# EAGLE board wiseboard9 (EAGLE 8.2.2)
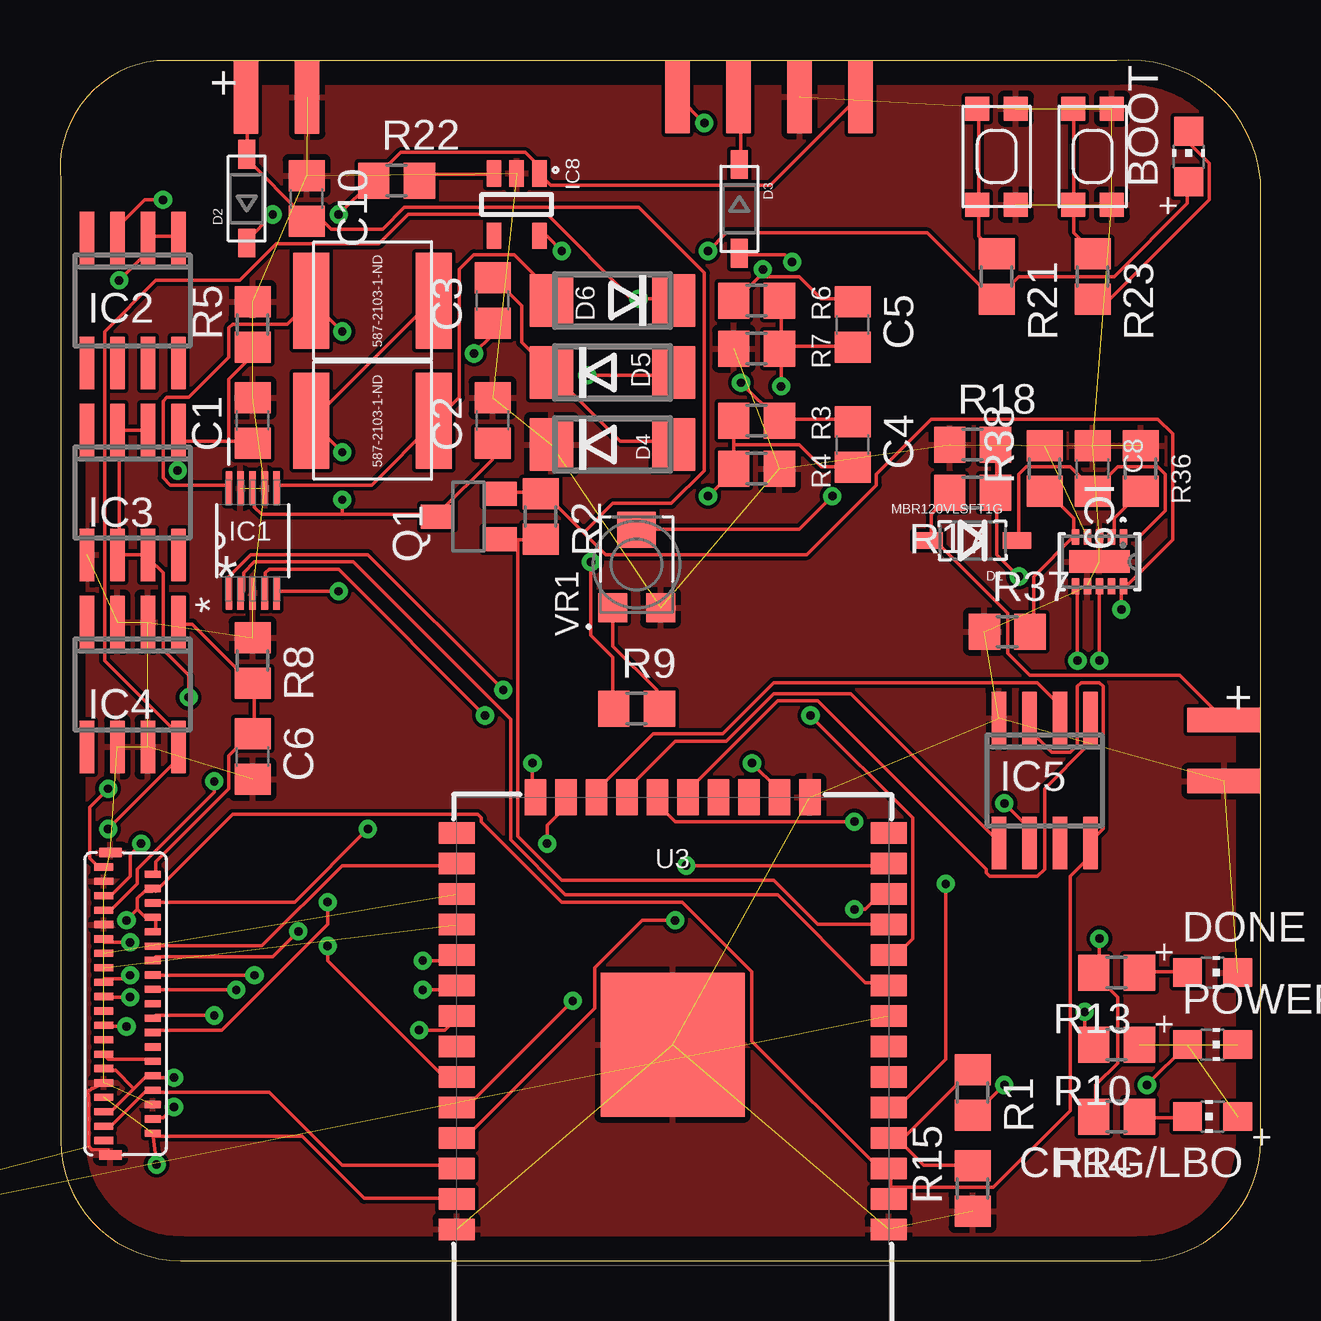
[diagram p0: board, top side]
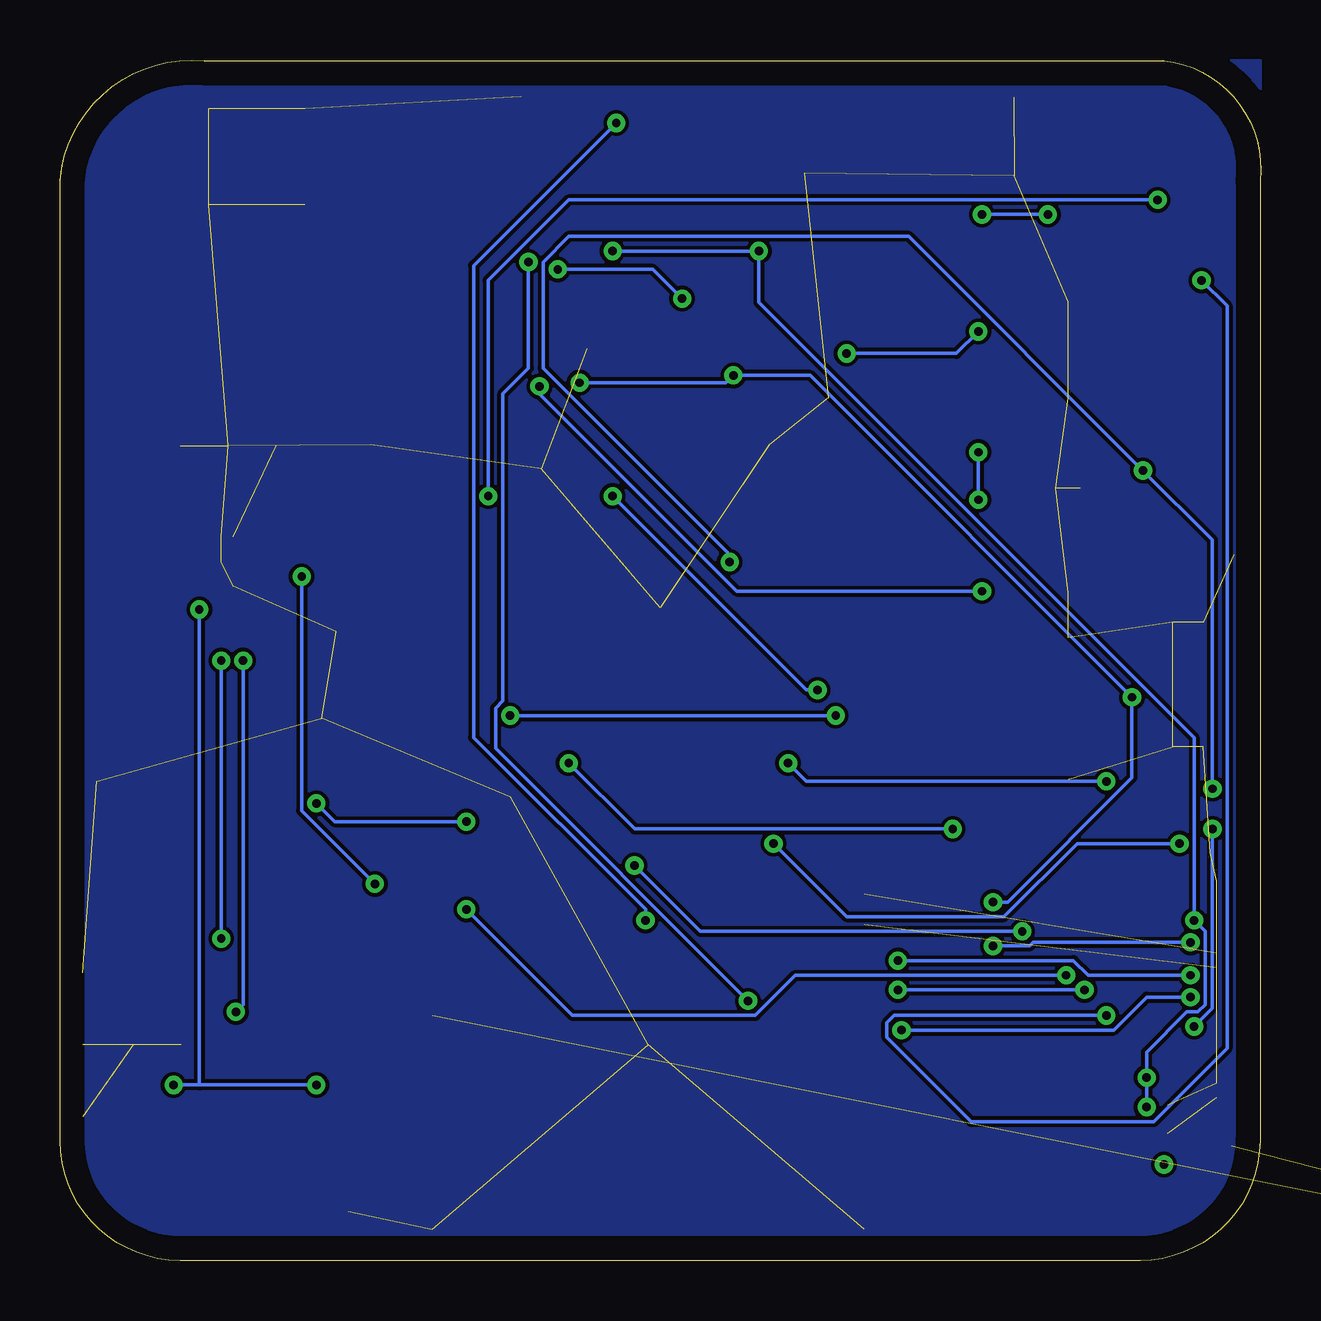
[diagram p1: board, bottom side, seen from below]

Size 50.03 x 50.02 mm. Coordinates in mm from the lower left corner, seen from the top.
Outline: 44.03,50 4.03,50 arc90 0.03,45 0.03,5 arc90 5.03,0 45.03,0 arc90 50.03,5 50.03,45 arc90 44.03,50
Copper layers (1*16): Top 0.035mm / dielectric 1.5mm / Bottom 0.035mm
Design rules "default": minimum track width 6mil, minimum drill 0.35mm, track to track 6mil, track to pad 6mil, pad to pad 6mil, via to via 6mil, smd to smd 6mil, copper to edge 40mil, drill to drill 6mil, minimum pad ring 10mil, minimum via ring 8mil, stop-mask expansion 4mil, vias tented up to drill 0mil, thermal gap 10mil

## Footprints (pad centres in the part's own frame; a part is rotated, then mirrored left to right if it is on the bottom)
587-2103-1-ND = smd 1.5 x 4: P$1 -2.55,0; P$2 2.55,0
CHIP-LED0805 = smd 1.2 x 1.2: A 0,-1.05; C 0,1.05
C0805 = smd 1.3 x 1.5: 1 -0.95,0; 2 0.95,0
SOD-123 = smd 1.2 x 0.7: A 1.85,0; C -1.85,0
DO214AA = smd 1.8 x 2.2: A 2.55,0; C -2.55,0
SOP50P490X110-10N = smd 1.397 x 0.279: 1 -2.184,0.991; 2 -2.184,0.508; 3 -2.184,0; 4 -2.184,-0.508; 5 -2.184,-0.991; 6 2.184,-0.991; 7 2.184,-0.508; 8 2.184,0; 9 2.184,0.508; 10 2.184,0.991
SO08 = smd 0.6 x 2.2: 1 -1.905,-2.6; 2 -0.635,-2.6; 3 0.635,-2.6; 4 1.905,-2.6; 5 1.905,2.6; 6 0.635,2.6; 7 -0.635,2.6; 8 -1.905,2.6
SO8 = smd 0.6 x 2.2: 1 -1.905,-2.6; 2 -0.635,-2.6; 3 0.635,-2.6; 4 1.905,-2.6; 5 1.905,2.6; 6 0.635,2.6; 7 -0.635,2.6; 8 -1.905,2.6
SOT95P280X145-5N = smd 1.1 x 0.6: 1 -1.3,0.95; 2 -1.3,0; 3 -1.3,-0.95; 4 1.3,-0.95; 5 1.3,0.95
DQC10_P84X2P4 = smd 0.66 x 0.305: 1 -1.029,1; 2 -1.029,0.5; 3 -1.029,0; 4 -1.029,-0.5; 5 -1.029,-1; 6 1.029,-1; 7 1.029,-0.5; 8 1.029,0; 9 1.029,0.5; 10 1.029,1 | smd 0.94 x 2.515: 11 0,0
EDGE_CON_2 = smd 1.016 x 3.048: 1 1.27,1.524; 2 -1.27,1.524
EDGE_CON_4 = smd 1.016 x 3.048: 1 2.54,0.254; 2 0,0.254; 3 -5.08,0.254; 4 -2.54,0.254
SOT23 = smd 1 x 1.4: 1 -0.95,-1.306; 2 0.95,-1.306; 3 0,1.306
R0805 = smd 1.3 x 1.5: 1 -0.95,0; 2 0.95,0
KMR2 = smd 1 x 1: 1 2,0.8; 2 2,-0.8; 3 -2,0.8; 4 -2,-0.8
ESP-WROOM-03 = smd 0.9 x 1.5: 1 7.7,9; 2 6.43,9; 3 5.16,9; 4 3.89,9; 5 2.62,9; 6 1.35,9; 7 0.08,9; 8 -1.19,9; 9 -2.46,9; 10 -3.73,9; 11 -5,9; 12 -6.27,9; 13 -7.54,9; 14 -8.81,9; 25 -8.81,-9; 26 -7.54,-9; 27 -6.27,-9; 28 -5,-9; 29 -3.73,-9; 30 -2.46,-9; 31 -1.19,-9; 32 0.08,-9; 33 1.35,-9; 34 2.62,-9; 35 3.89,-9; 36 5.16,-9; 37 6.43,-9; 38 7.7,-9 | smd 1.5 x 0.9: 15 -10.3,5.715; 16 -10.3,4.445; 17 -10.3,3.175; 18 -10.3,1.905; 19 -10.3,0.635; 20 -10.3,-0.635; 21 -10.3,-1.905; 22 -10.3,-3.175; 23 -10.3,-4.445; 24 -10.3,-5.715 | smd 6 x 6: GND 0,0
HFQ339CT-ND = smd 0.4 x 0.95: GND@1 6.6,-0.925; GND@2 -6,-0.925 | smd 0.3 x 0.8: P$1 -5.4,-1.2; P$3 -4.8,-1.2; P$5 -4.2,-1.2; P$7 -3.6,-1.2; P$9 -3,-1.2; P$11 -2.4,-1.2; P$13 -1.8,-1.2; P$15 -1.2,-1.2; P$17 -0.6,-1.2; P$19 0,-1.2; P$21 0.6,-1.2; P$23 1.2,-1.2; P$25 1.8,-1.2; P$27 2.4,-1.2; P$29 3,-1.2; P$31 3.6,-1.2; P$33 4.2,-1.2; P$35 4.8,-1.2; P$37 5.4,-1.2; P$39 6,-1.2 | smd 0.3 x 0.65: P$2 -5.1,0.838; P$4 -4.5,0.838; P$6 -3.9,0.838; P$8 -3.3,0.838; P$10 -2.7,0.838; P$12 -2.1,0.838; P$14 -1.5,0.838; P$16 -0.9,0.838; P$18 -0.3,0.838; P$20 0.3,0.838; P$22 0.9,0.838; P$24 1.5,0.838; P$26 2.1,0.838; P$28 2.7,0.838; P$30 3.3,0.838; P$32 3.9,0.838; P$34 4.5,0.838; P$36 5.1,0.838; P$38 5.7,0.838
TRIM_TC33X-2-103E = smd 1.2 x 1.2: 1 -1.8,1; 3 -1.8,-1 | smd 1.5 x 1.6: 2 1.45,0

## Placement (x,y rotation side)
22  587-2103-1-ND  [587-2103-1-ND]  13.03,40 180 top
BOOT  LED1  [CHIP-LED0805]  47.03,46 0 top
C1  1uF  [C0805]  8.03,35 90 top
C2  1uF  [C0805]  18.03,35 90 top
C3  1uF  [C0805]  18.03,40 90 top
C4  10uF  [C0805]  33.03,34 270 top
C5  10uF  [C0805]  33.03,39 270 top
C6  1uF  [C0805]  8.03,21 270 top
C8  10uF  [C0805]  43.03,33 270 top
C10  10uF  [C0805]  10.28,44.25 270 top
CHRG/LBO  LED3  [CHIP-LED0805]  48.03,6 90 top
D1  MBR120VLSFT1G  [SOD-123]  38.03,30 180 top
D2  MBR120  [SOD-123]  7.78,44.25 90 top
D3  1n4148  [SOD-123]  28.31,43.82 270 top
D4  SS24  [DO214AA]  23.03,34 0 top
D5  SS24  [DO214AA]  23.03,37 0 top
D6  SS24  [DO214AA]  23.03,40 180 top
DONE  LED4  [CHIP-LED0805]  48.03,12 270 top
IC1  LT1945  [SOP50P490X110-10N]  8.03,30 90 top
IC2  LM358  [SO08]  3.03,40 180 top
IC3  L79L15  [SO8]  3.03,32 180 top
IC4  L78L15  [SO8]  3.03,24 180 top
IC5  W25Q  [SO8]  41.03,20 180 top
IC8  IC6  [SOT95P280X145-5N]  19.03,44 270 top
IC9  BQ24210DQCT  [DQC10_P84X2P4]  43.31,29.12 270 top
J1  BAT_CON  [EDGE_CON_2]  9.03,50 180 top
J2  SOL_CON  [EDGE_CON_2]  50.03,21.25 90 top
J3  PROG_HEADER  [EDGE_CON_4]  28.28,48.75 180 top
J4  BUT_CON  [EDGE_CON_2]  -9.97,0 0 top  (outside the outline)
POWERGOOD  LED2  [CHIP-LED0805]  48.03,9 270 top
Q1  IRLM  [SOT23]  17.03,31 90 top
R1  10K  [R0805]  38.03,7 270 top
R2  10k  [R0805]  20.03,31 270 top
R3  470k  [R0805]  29.03,35 0 top
R4  39k  [R0805]  29.03,33 180 top
R5  39k  [R0805]  8.03,39 90 top
R6  560k  [R0805]  29.03,40 180 top
R7  39k  [R0805]  29.03,38 0 top
R8  39k  [R0805]  8.03,25 270 top
R9  200k  [R0805]  24.03,23 0 top
R10  1K  [R0805]  44.03,9 180 top
R13  1K  [R0805]  44.03,12 180 top
R14  1K  [R0805]  44.03,6 180 top
R15  10K  [R0805]  38.03,3 90 top
R17  10K  [R0805]  38.03,32 180 top
R18  10K  [R0805]  38.03,34 0 top
R21  10K  [R0805]  39.03,41 270 top
R22  10K  [R0805]  14.03,45 0 top
R23  1K  [R0805]  43.03,41 270 top
R36  790  [R0805]  45.03,33 270 top
R37  10k  [R0805]  39.47,26.2 0 top
R38  7.6k  [R0805]  41.03,33 90 top
SW1  SPST_TACT-KMR2  [KMR2]  43.03,46 270 top
SW2  SPST_TACT-KMR2  [KMR2]  39.03,46 270 top
U3  ESP-WROOM-03  [ESP-WROOM-03]  25.53,9 270 top
U$4  FH26W-39S  [HFQ339CT-ND]  3.03,11 270 top
U$5  587-2103-1-ND  [587-2103-1-ND]  13.03,35 180 top
VR1  TC33X-104ECT-ND  [TRIM_TC33X-2-103E]  24.03,29 90 top

## Library data of the parts
22 D4-D6 IC3-IC5 IC8 J1-J4 U$4 U$5 = WISE
BOOT CHRG/LBO D2 D3 DONE POWERGOOD SW1 SW2 = adafruit
C1-C6 C8 C10 R1-R10 R13-R15 R17 R18 R21-R23 R36-R38 = resistor
D1 = microbuilder
IC1 = LTC_By_element14_Batch_1; MPN: LT1945EMS#PBF; OC_FARNELL: 1273495; OC_NEWARK: 57M7266; PACKAGE: MSOP-10; SUPPLIER: Linear Technology
IC2 = linear
IC9 = WISE; MANUFACTURER_PART_NUMBER: BQ24210DQCT; VENDOR: Vendor
Q1 = IRLML6402; AVAILABILITY: Unavailable; DESCRIPTION: MOSFETs, Semiconductors and Actives, mosfet, Transistors, Discretes (diodes, transistors, thyristors ...); MF: International Rectifier; MP: IRLML6402; PACKAGE: SOT-23-3 International Rectifier; PRICE: None
U3 = esp32
VR1 = WISE; AVAILABILITY: Good; DESCRIPTION: Res%20Trimmer%2010K%20Ohm%2025%25%200.1W%281/10W%29%201%28Elec%29/1%28Mech%29Turn%20%283%20X%203.8mm%29%20Foot%20Print%20SMD%20Embossed%20T/R; MF: Bourns; MP: TC33X-2-103E; PACKAGE: None; PRICE: 0.16 USD

## Nets
+3V3: BOOT.A IC5.3 IC5.8 IC8.5 R21.2 U3.2 U3.3 U$4.P$4 U$4.P$8 U$4.P$10 U$4.P$29 U$4.P$30 U$4.P$35 U$4.P$36
+15V: C6.1 IC4.1 R8.2 U$4.P$2
+22V: C5.1 D6.C IC4.8 R6.2 U$4.P$23
-15V: C1.1 IC3.1 R5.1 R9.1 U$4.P$1
-20V: C4.1 D5.A IC3.2 IC3.3 IC3.6 IC3.7 R3.2 U$4.P$24
BAT_SENS: R1.1 R15.2 U3.4
BUT_CON: J4.1 U3.8
CKV: U3.37 U$4.P$33 U$4.P$38
CL: U3.23 U$4.P$5
CLK: IC5.6 U3.20
D0: U3.26 U$4.P$12
D1: U3.27 U$4.P$13
D2: U3.13 U$4.P$14
D3: U3.28 U$4.P$15
D4: U3.12 U$4.P$16
D5: U3.29 U$4.P$17
D6: U3.30 U$4.P$18
D7: U3.31 U$4.P$19
ESP_DI: IC5.2 U3.22
ESP_DO: IC5.5 U3.21
FB2: C5.2 IC1.5 R6.1 R7.2
GMODE: U$4.P$27 U$4.P$28
GND: C1.2 C2.2 C6.2 C8.1 C10.1 D4.C DONE.C IC1.3 IC1.7 IC1.9 IC3.5 IC4.2 IC4.3 IC4.6 IC4.7 IC5.4 IC8.2 IC9.3 IC9.7 IC9.11 J1.2 J2.2 J3.4 J4.2 R4.1 R5.2 R7.1 R8.1 R15.1 R18.1 R36.1 R37.1 SW1.1 SW1.3 SW2.1 SW2.3 U3.1 U3.15 U3.38 U3.GND U$4.GND@1 U$4.GND@2 U$4.P$3 U$4.P$9 U$4.P$31 U$4.P$34 VR1.3
GPIO0: R23.1 SW1.2 SW1.4
IC5: IC5.1 U3.19
LE: U3.16 U$4.P$6
N$1: IC2.3 VR1.2
N$2: 22.P$2 C3.1 IC1.10
N$3: C8.2 D1.C IC9.1
N$4: 22.P$1 C2.1 IC1.8 Q1.3 U$5.P$2
N$5: D6.A IC1.6 U$5.P$1
N$6: C3.2 D4.A D5.C
N$7: U3.25
N$8: R9.2 VR1.1
N$9: IC9.6 R10.2
N$10: CHRG/LBO.C R14.1
N$11: POWERGOOD.C R10.1
N$14: DONE.A R13.1
N$15: IC9.8 R13.2 R14.2
N$17: IC9.2 R36.2
N$22: BOOT.C R23.2
N$23: IC8.3 R22.2
N$28: IC9.5 R37.2 R38.1
N$30: IC9.4 R38.2
N$37: U3.14
N$48: U3.6
N$49: U3.7
NEGEN: IC1.2 U3.9
NFB1: C4.2 IC1.1 R3.1 R4.2
OE: U3.24 U$4.P$7
PANEL: D1.A J2.1 R17.2
PANEL_SENS: R17.1 R18.2 U3.5
POSEN: IC1.4 U3.10
RESET: R21.1 SW2.2 SW2.4
RXD: D3.A U3.34
RXD_5V: D3.C J3.2
SPH: U3.33 U$4.P$11
SPV: U3.36 U$4.P$32 U$4.P$37
SUP_CTRL: Q1.1 R2.2 U3.11
TXD: J3.1 U3.35
V+: IC2.8
V-: IC2.4
VBAT: C10.2 CHRG/LBO.A D2.A IC9.10 J1.1 POWERGOOD.A Q1.2 R1.2 R2.1
VCC: D2.C IC8.1 J3.3 R22.1
VCOMMON: IC2.1 IC2.2 U$4.P$22

## Tracks (layer width: path | path; a pad name or v marks a point on that pad's centre or on a via)
+3V3  (via drill 0.35)
  Top 0.152: 34.62,3.05 34.62,3.81 U3.3 34.47,3.96 34.01,3.96 28.83,9.14 28.83,12.04 25.93,14.94 20.91,14.94 17.55,18.29 17.55,18.44 17.4,18.59 7.19,18.59 3.99,15.39 U$4.P$4 3.84,15.39 3.53,15.39 3.23,15.09 3.23,14.63 | 34.62,3.05 34.62,2.59 U3.2 | 34.62,3.05 38.89,3.05 42.09,6.25 42.09,16 42.85,16.76 42.85,17.37 IC5.8 43,17.53 43.46,17.98 43.46,23.93 43.31,24.08 42.55,24.08 42.39,23.93 42.39,21.49 42.09,21.18 41.33,21.18 40.41,22.1 40.41,22.55 IC5.3 | U$4.P$10 3.99,13.72 3.99,14.17 U$4.P$8 3.84,14.33 3.53,14.33 3.23,14.63 | v4.75,6.4 4.29,5.94 3.99,5.94 U$4.P$36 | v4.75,7.62 3.99,7.62 U$4.P$30 3.84,7.62 3.53,7.62 3.07,7.16 | 3.07,7.16 2.16,6.25 1.86,6.25 U$4.P$35 | 3.07,7.16 2.31,7.92 1.86,7.92 U$4.P$29 | v2.77,14.17 3.23,14.63 | v20.91,42.06 20.3,42.67 19.99,42.67 IC8.5 | v27,42.06 27.76,42.82 36.15,42.82 38.89,40.08 R21.2 39.04,40.08 39.96,41 43.92,41 46.97,44.04 46.97,44.81 BOOT.A
  Bottom 0.152: v4.75,6.4 v4.75,7.62 4.75,8.69 3.07,10.36 2.62,10.36 2.31,10.67 2.31,13.72 v2.77,14.17 2.77,21.79 20.91,39.93 v20.91,42.06 v27,42.06
+15V
  Top 0.152: U$4.P$2 3.99,16.15 3.99,16.61 7.04,19.66 7.04,21.03 7.95,21.95 C6.1 8.1,22.1 8.1,23.93 R8.2 7.95,24.08 5.51,26.52 5.06,26.52 IC4.1
+22V  (via drill 0.35)
  Top 0.152: 29.29,41 29.13,41 28.22,40.08 R6.2 | 29.29,41 30.81,41 31.73,40.08 32.94,40.08 C5.1 | v2.77,9.75 1.86,9.75 U$4.P$23 | v2.01,17.98 4.9,20.88 4.9,21.34 IC4.8 4.9,21.49 4.9,21.95 1.86,24.99 1.86,38.71 3.99,40.84 7.49,40.84 9.02,42.37 13.29,42.37 14.5,43.59 20.3,43.59 23.8,40.08 v24.11,40.08 25.48,40.08 D6.C | v29.29,41.3 29.29,41
  Bottom 0.152: v2.77,9.75 2.01,10.52 v2.01,17.98 | v29.29,41.3 25.32,41.3 v24.11,40.08
-15V  (via drill 0.35)
  Top 0.152: v2.01,19.66 1.25,18.9 1.25,16.76 1.55,16.46 1.7,16.46 U$4.P$1 | 4.9,34.14 4.9,34.59 IC3.1 4.9,34.14 | 4.9,34.14 v4.9,32.92 | 4.9,34.14 7.04,34.14 | 7.04,34.14 7.95,34.14 C1.1 | 7.04,34.14 7.04,36.73 7.95,37.64 7.95,37.95 R5.1 | v22.12,29.11 22.12,26.06 23.04,25.15 23.04,23.01 R9.1
  Bottom 0.152: v2.01,19.66 2.01,30.02 v4.9,32.92 14.66,42.67 28.83,42.67 29.9,41.6 29.9,37.19 22.12,29.41 v22.12,29.11
-20V  (via drill 0.35)
  Top 0.152: 2.46,34.59 3.53,34.59 IC3.2 | C4.1 32.94,35.05 30.05,35.05 R3.2 29.9,35.05 v28.37,36.58 | v11.15,14.94 11.15,14.02 6.73,9.6 3.99,9.6 U$4.P$24 | v5.36,23.47 5.36,24.38 4.29,25.45 4.29,28.65 3.68,29.26 IC3.7 3.53,29.41 2.46,29.41 | v21.97,36.88 25.48,36.88 D5.A | 2.46,29.41 2.46,34.59 | 2.46,34.59 IC3.3 | 2.46,29.41 IC3.6
  Bottom 0.152: v11.15,14.94 10.54,14.94 5.36,20.12 v5.36,23.47 18.77,36.88 v21.97,36.88 22.28,36.58 v28.37,36.58
BAT_SENS
  Top 0.152: 34.93,5.03 35.99,3.96 37.97,3.96 R15.2 | 34.93,5.03 34.62,5.03 U3.4 34.93,5.03 | 34.93,5.03 35.08,5.03 37.97,7.92 R1.1
BUT_CON  (1 unrouted)
CKV  (via drill 0.35)  (1 unrouted)
  Top 0.152: U3.37 16.49,2.59 12.68,2.59 10.08,5.18 3.99,5.18 U$4.P$38 v4.03,4
CL  (via drill 0.35)
  Top 0.152: v3.38,17.37 2.92,16.92 2.92,16 2.16,15.24 1.86,15.24 U$4.P$5 | v20.3,17.37 20.3,18.14 21.06,18.9 21.06,19.2 U3.23
  Bottom 0.152: v3.38,17.37 7.65,17.37 10.69,14.33 17.25,14.33 v20.3,17.37
CLK  (via drill 0.35)
  Top 0.152: v33.1,18.29 25.63,18.29 25.02,18.9 25.02,19.2 U3.20 | v39.35,19.05 40.26,18.14 40.26,17.53 IC5.6
  Bottom 0.152: v33.1,18.29 38.58,18.29 v39.35,19.05
D0
  Top 0.152: U$4.P$12 3.99,13.11 8.41,13.11 11.76,16.46 16.49,16.46 U3.26
D1  (1 unrouted)
D2  (via drill 0.35)
  Top 0.152: v9.93,13.72 8.87,12.65 3.99,12.65 U$4.P$14 | v26.09,16.46 34.47,16.46 U3.13
  Bottom 0.152: v9.93,13.72 23.34,13.72 v26.09,16.46
D3  (1 unrouted)
D4  (via drill 0.35)
  Top 0.152: v8.1,11.89 3.99,11.89 U$4.P$16 | v33.1,14.63 33.55,14.63 34.16,15.24 34.47,15.24 U3.12
  Bottom 0.152: v8.1,11.89 19.38,11.89 21.06,10.21 28.68,10.21 v33.1,14.63
D5  (via drill 0.35)
  Top 0.152: v2.92,11.89 2.77,11.73 1.86,11.73 U$4.P$17 | v15.11,12.5 16.33,12.5 16.49,12.65 U3.29
  Bottom 0.152: v2.92,11.89 7.19,11.89 7.8,12.5 v15.11,12.5
D6  (via drill 0.35)
  Top 0.152: v7.34,11.28 3.99,11.28 U$4.P$18 | v15.11,11.28 16.33,11.28 16.49,11.43 U3.30
  Bottom 0.152: v15.11,11.28 v7.34,11.28
D7  (via drill 0.35)
  Top 0.152: v2.92,10.97 1.86,10.97 U$4.P$19 | v14.96,9.6 16.03,9.6 16.49,10.06 U3.31
  Bottom 0.152: v2.92,10.97 4.75,10.97 6.12,9.6 v14.96,9.6
ESP_DI
  Top 0.152: U3.22 22.43,19.36 22.43,19.66 24.72,21.95 27.61,21.95 29.74,24.08 40.72,24.08 41.63,23.16 41.63,22.71 IC5.2
ESP_DO
  Top 0.152: U3.21 23.65,19.36 23.65,19.66 25.63,21.64 27.76,21.64 29.74,23.62 32.94,23.62 39.04,17.53 IC5.5
FB2  (via drill 0.35)
  Top 0.152: v11.61,27.89 9.02,27.89 IC1.5 | v30.05,36.42 30.05,37.95 R7.2 30.05,38.1 | 30.05,38.1 32.94,38.1 C5.2 | 30.05,38.1 30.05,39.93 R6.1
  Bottom 0.152: v11.61,27.89 21.82,27.89 30.05,36.12 v30.05,36.42
GMODE
  Top 0.152: U$4.P$28 3.84,8.38 2.01,8.38 1.86,8.53 U$4.P$27
GND  (45 unrouted)
  Top 0.152: U$4.P$31 1.38,7.18 1.33,7.18 1.28,7.13 1.12,7.05 1.2,6.83 1.2,4.75 1.33,4.62 2.02,4.62 U$4.GND@1
  pour Top: 0.03,50 45.96,50 arc-45 49.49,48.54 50.03,48 50.03,4.41 arc-45 49.03,2 47.03,0 4.1,0 arc-45 0.56,1.46 0.03,2
  pour Bottom: 0.03,50 45.96,50 arc-45 49.49,48.54 50.03,48 50.03,4.41 arc-45 49.03,2 47.03,0 4.1,0 arc-45 0.56,1.46 0.03,2
GPIO0
  Top 0.152: R23.1 43,42.06 42.24,42.82 42.24,43.89 SW1.2 42.24,44.04 42.24,47.85 SW1.4
IC5
  Top 0.152: U3.19 26.24,19.36 26.24,19.66 29.9,23.32 31.57,23.32 38.58,16.31 38.58,16.15 38.74,16 40.72,16 41.02,16.31 41.02,19.66 42.85,21.49 42.85,22.55 IC5.1
LE  (via drill 0.35)
  Top 0.152: v12.83,17.98 9.78,14.94 3.99,14.94 U$4.P$6 | v28.83,20.73 29.9,19.66 29.9,19.36 U3.16
  Bottom 0.152: v12.83,17.98 26.09,17.98 v28.83,20.73
N$1  (via drill 0.35)
  Top 0.152: v32.18,31.85 30.81,30.48 24.11,30.48 VR1.2 | v4.29,44.2 3.53,44.2 2.46,43.13 2.46,42.67 IC2.3
  Bottom 0.152: v32.18,31.85 32.18,40.84 28.83,44.2 v4.29,44.2
N$2  (via drill 0.35)
  Top 0.152: IC1.10 7.04,32.31 4.6,32.31 4.29,32.61 4.29,35.81 4.45,35.97 5.36,35.97 7.04,37.64 7.04,38.86 7.19,39.01 9.48,39.01 10.39,39.93 22.P$2 10.54,39.93 v11.76,38.71 | v17.25,37.8 18.01,38.56 18.01,39.01 C3.1
  Bottom 0.152: v17.25,37.8 12.68,37.8 v11.76,38.71
N$3
  Top 0.152: IC9.1 44.37,30.18 44.98,30.18 46.05,31.24 46.05,32.77 45.75,33.07 44.07,33.07 43.16,32.16 C8.2 43,32.16 42.09,33.07 40.26,33.07 39.96,32.77 39.96,30.02 D1.C
N$4  (via drill 0.35)
  Top 0.152: 11.76,31.09 15.57,31.09 Q1.3 15.72,31.09 18.01,33.38 18.01,33.98 C2.1 | 11.76,31.09 8.41,31.09 8.1,31.39 8.1,32.16 IC1.8 | 22.P$1 15.57,40.08 10.54,35.05 U$5.P$2 10.54,34.9 v11.76,33.68 | v11.76,31.7 11.76,31.09
  Bottom 0.152: v11.76,33.68 v11.76,31.7
N$5
  Top 0.152: IC1.6 9.02,32.31 12.98,32.31 15.57,34.9 U$5.P$1 15.72,35.05 16.64,35.97 16.64,41.3 17.25,41.91 18.92,41.91 20.45,40.39 20.45,40.08 D6.A
N$6
  Top 0.152: C3.2 18.16,40.84 19.23,39.78 19.23,38.25 20.45,37.03 D5.C 20.6,36.88 23.34,34.14 25.48,34.14 D4.A
N$8
  Top 0.152: VR1.1 23.04,27.13 23.04,25.6 24.87,23.77 24.87,23.01 R9.2
N$9  (via drill 0.35)
  Top 0.152: v42.39,24.99 42.39,28.04 IC9.6 | v42.7,10.36 42.7,9.45 43,9.14 R10.2
  Bottom 0.152: v42.39,24.99 42.39,10.67 v42.7,10.36
N$10
  Top 0.152: CHRG/LBO.C 46.97,5.94 44.98,5.94 R14.1
N$11  (1 unrouted)
N$14
  Top 0.152: DONE.A 46.97,12.04 44.98,12.04 R13.1
N$15  (via drill 0.35)
  Top 0.152: v43.31,24.99 43.31,28.04 IC9.8 | v43.31,13.41 43.31,12.19 43.16,12.04 R13.2 43.16,11.89 44.07,10.97 44.07,8.23 43.16,7.32 43.16,6.1 R14.2
  Bottom 0.152: v43.31,13.41 v43.31,24.99
N$17
  Top 0.152: IC9.2 43.92,30.18 43.92,30.94 44.98,32 R36.2
N$22
  Top 0.152: BOOT.C 47.12,46.94 47.12,46.48 47.88,45.72 47.88,44.2 43.77,40.08 43.16,40.08 R23.2
N$23
  Top 0.152: IC8.3 18.01,45.26 15.27,45.26 15.11,45.11 R22.2
N$28
  Top 0.152: 42.24,30.18 42.24,30.94 41.17,32 R38.1 | 42.24,30.18 40.56,28.5 40.56,26.21 R37.2 | 42.24,30.18 IC9.5
N$30  (1 unrouted)
NEGEN
  Top 0.152: IC1.2 7.65,27.89 7.65,28.65 8.1,29.11 12.22,29.11 18.77,22.55 18.77,17.53 21.06,15.24 29.9,15.24 33.55,11.58 34.47,11.58 U3.9
NFB1  (via drill 0.35)
  Top 0.152: v18.47,23.77 12.83,29.41 7.95,29.41 7.04,28.5 7.04,27.89 IC1.1 | v27,31.85 28.07,32.92 R4.2 28.07,33.07 28.07,33.98 | 28.07,33.98 28.07,34.9 R3.1 | 28.07,33.98 30.81,33.98 31.73,33.07 32.94,33.07 C4.2
  Bottom 0.152: v18.47,23.77 18.92,23.77 v27,31.85
OE  (via drill 0.35)
  Top 0.152: v6.43,19.96 6.43,19.51 3.23,16.31 3.23,15.7 2.16,14.63 1.86,14.63 U$4.P$7 | v19.69,20.73 19.69,19.36 U3.24
  Bottom 0.152: v6.43,19.96 18.92,19.96 v19.69,20.73
PANEL
  Top 0.152: R17.2 37.06,31.85 36.3,31.09 36.3,30.02 D1.A 36.3,29.87 36.6,29.87 39.5,26.98 39.5,25.3 40.41,24.38 46.66,24.38 48.49,22.55 J2.1
PANEL_SENS  (via drill 0.35)
  Top 0.152: v36.91,15.7 36.91,8.38 34.93,6.4 34.62,6.4 U3.5 | v39.96,28.5 39.04,29.41 39.04,31.85 R17.1 39.04,32 39.04,33.98 R18.2
  Bottom 0.152: v36.91,15.7 39.96,18.75 v39.96,28.5
POSEN  (via drill 0.35)
  Top 0.152: v17.7,22.71 11.61,28.8 8.71,28.8 8.56,28.65 8.56,27.89 IC1.4 | v31.27,22.71 35.54,18.44 35.54,13.41 34.93,12.8 34.62,12.8 U3.10
  Bottom 0.152: v31.27,22.71 v17.7,22.71
RESET
  Top 0.152: R21.1 38.89,42.06 38.28,42.67 38.28,43.89 SW2.2 38.28,44.04 38.28,47.85 SW2.4
RXD  (via drill 0.35)
  Top 0.152: v30.51,41.6 30.2,41.91 28.37,41.91 D3.A | v21.36,10.82 16.94,6.4 16.64,6.4 U3.34
  Bottom 0.152: v30.51,41.6 30.51,37.19 31.57,36.12 31.57,23.32 31.88,23.01 31.88,21.34 v21.36,10.82
RXD_5V
  Top 0.152: D3.C 28.37,45.72 28.37,48.46 J3.2
SPH  (via drill 0.35)
  Top 0.152: v2.92,13.26 1.86,13.26 U$4.P$11 | v11.15,13.11 11.15,12.5 15.88,7.77 16.49,7.77 U3.33
  Bottom 0.152: v2.92,13.26 9.48,13.26 9.63,13.11 v11.15,13.11
SPV
  Top 0.152: U$4.P$37 1.86,5.64 2.16,5.64 3.53,7.01 3.84,7.01 U$4.P$32 3.99,7.01 8.71,7.01 11.76,3.96 16.49,3.96 U3.36
SUP_CTRL
  Top 0.152: 19.08,30.02 19.99,30.02 R2.2 | 19.08,30.02 18.47,30.02 Q1.1 | 19.08,30.02 19.08,17.68 20.91,15.85 29.74,15.85 31.57,14.02 34.47,14.02 U3.11
TXD  (via drill 0.35)
  Top 0.152: v25.63,14.17 24.26,14.17 22.28,12.19 22.28,10.52 16.94,5.18 16.64,5.18 U3.35 | v26.85,47.4 25.78,48.46 J3.1
  Bottom 0.152: v25.63,14.17 25.63,14.63 32.79,21.79 32.79,41.45 v26.85,47.4
VBAT  (via drill 0.35)  (1 unrouted)
  Top 0.152: v45.29,7.32 POWERGOOD.A | v39.35,7.32 38.13,6.1 R1.2 | J1.1 7.8,48.46 7.8,46.18 D2.A 7.65,46.02 10.24,43.43 C10.2 10.39,43.28 11,43.28 11.3,42.98 13.44,42.98 14.35,43.89 24.11,43.89 26.85,41.15 26.85,32.92 25.48,31.55 23.04,31.55 21.82,30.33 | 21.82,30.33 20.14,32 R2.1 19.99,32 18.47,32 Q1.2 | 21.82,30.33 22.73,29.41 31.12,29.41 34.01,32.31 34.01,32.77 36.3,35.05 45.75,35.05 46.36,34.44 46.36,30.02 44.53,28.19 44.37,28.19 IC9.10 44.22,28.04 v44.22,27.13
  Bottom 0.152: v39.35,7.32 44.22,7.32 | 44.22,7.32 v45.29,7.32 | v44.22,27.13 44.22,7.32
VCC  (via drill 0.35)
  Top 0.152: v8.87,43.59 7.8,42.52 D2.C | v11.61,43.59 12.98,44.96 R22.1 13.13,45.11 14.2,46.18 19.38,46.18 19.84,45.72 19.84,45.41 IC8.1 19.99,45.26 20.45,44.81 29.59,44.81 33.25,48.46 J3.3
  Bottom 0.152: v11.61,43.59 v8.87,43.59
VCOMMON  (via drill 0.35)
  Top 0.152: v6.43,10.21 3.99,10.21 U$4.P$22 | v2.46,40.84 3.53,41.91 3.53,42.52 IC2.2 3.68,42.67 4.9,42.67 IC2.1
  Bottom 0.152: v6.43,10.21 15.27,10.21 15.57,9.91 15.57,9.3 12.07,5.79 4.45,5.79 1.4,8.84 1.4,39.78 v2.46,40.84

## Text on the board
tPlace: *